# Altium PCB vehicle.PcbDoc
Units mm, origin at the board's own origin, x right, y up, seen from the top; angles counter-clockwise.
Board outline 40.6 x 27.3 mm, 2 copper layers (Top Layer, Bottom Layer); 26 components, 29 nets, 145 pads, 21 vias.
Unrouted connection lines stored in the file: 1.
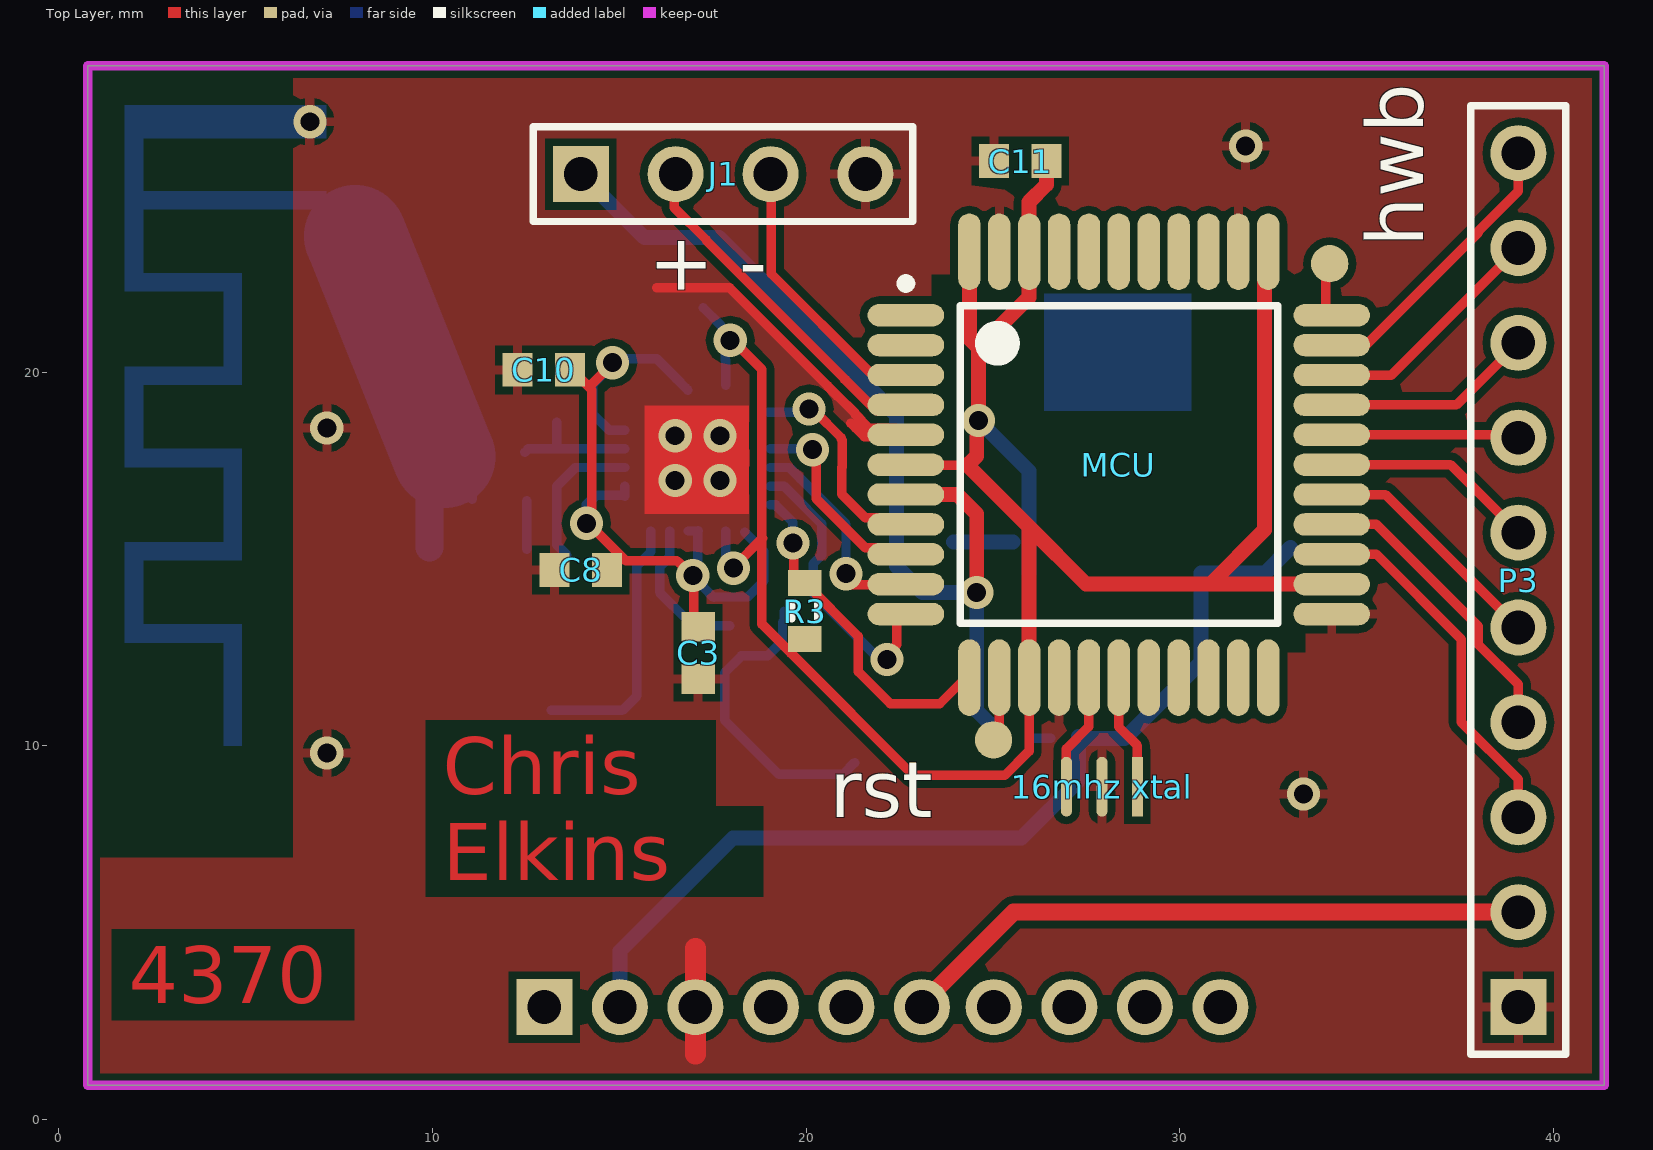
[diagram p0: Top Layer view]
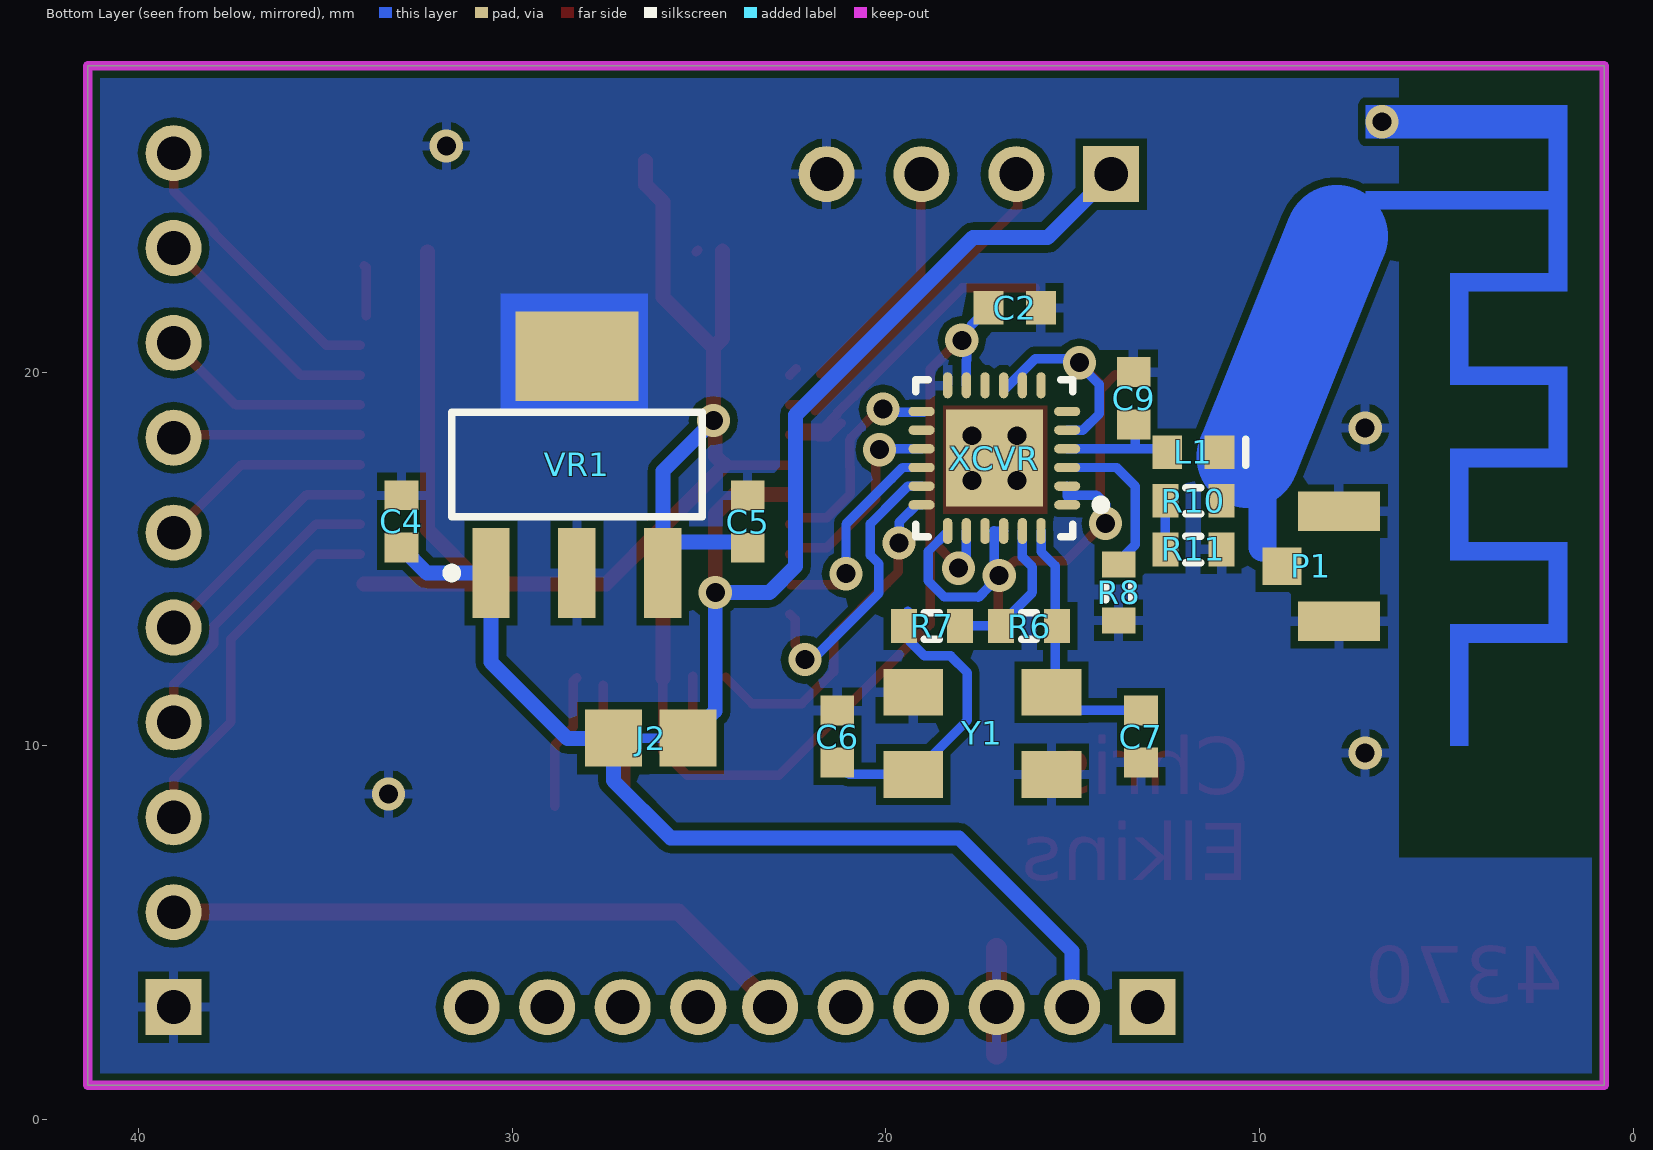
[diagram p1: Bottom Layer view, seen from below]

## Layer stack, top to bottom
Top Layer: signal copper 0.0356
Dielectric: dielectric 0.32, FR-4, Dk 4.8
Bottom Layer: signal copper 0.0356

## Board outline
0.77,0.9 0.77,28.2 41.37,28.2 41.37,0.9

## Design rules (kind name [scope] priority, off if disabled: settings)
Clearance [All] p1: gap=0.2
PolygonConnect [All] p1: connectstyle=Relief reliefconductorwidth=0.254 reliefentries=4 polygonreliefangle="90 Angle" airgapwidth=0.254
RoomDefinition vehicle [InComponentClass('vehicle')] p1: confinementstyle=ConfineOut formatcopy=TRUE lockcomponents=FALSE outline 145.97,-62.1 149.97,-62.1 149.97,-45.1 145.97,-45.1
RoutingVias [All] p1: holewidth=0.711 width=1.27 viastyle="Through Hole" minholewidth=0.711 minwidth=1.27 maxholewidth=0.711 maxwidth=1.27
SilkToSolderMaskClearance SilkscreenOverComponentPads [IsPad] p1: minsilkscreentomaskgap=0.254 clearancetoexposedcopper=TRUE
SolderMaskExpansion [All] p1: expansion=0.102
Width [All] p1: maxlimit=5 minlimit=0.254 preferedwidth=0.254
27 further rules are at their usual default settings.

## Components (designator, comment, footprint, x,y, rotation, side; value= is the part's Value field where it differs from the comment)
"16mhz xtal" "NCSTCE16M0V53-R0" OSC 28.87,8.9 r180 top
C2 "Cap Semi" CAPC1608L 16.55,21.72 r0 bottom
C3 "Cap Semi" CAPC1608L 17.11,12.48 r90 top
C4 "Cap Semi" CAPC1608L 32.97,16 r270 bottom
C5 "Cap Semi" CAPC1608L 23.702,15.996 r270 bottom
C6 "Cap Semi" CAPC1608L 21.302,10.242 r270 bottom
C7 "Cap Semi" CAPC1608L 13.174,10.242 r90 bottom
C8 "Cap Semi" CAPC1608L 13.97,14.7 r0 top
C9 "Cap Semi" CAPC1608L 13.37,19.3 r90 bottom
C10 "Cap Semi" CAPC1608L 12.98,20.06 r180 top
C11 "Cap Semi" CAPC1608L 25.734,25.648 r180 top
J1 "5000750517" HDR1X4 13.97,25.3 r0 top
J2 "jumper" "jumper pad" 25.3,10.2 r0 bottom
L1 "Inductor" INDC1608L 11.77,17.85 r0 bottom
MCU "ATMega32u4" TQFP44_M 28.374,17.52 r0 top
P1 "u.fl" "U.FL connector" 7.87,14.8 r270 bottom
P3 "Header 10" HDR1X10 39.07,3 r90 top
R3 "Res3" RESC1608L 19.97,13.6 r270 top
R6 "Res3" RESC1608L 16.17,13.2 r180 bottom
R7 "Res3" RESC1608L 18.77,13.2 r180 bottom
R8 "Res3" RESC1608L 13.77,14.1 r90 bottom
R10 "Res3" RESC1608L 11.77,16.55 r180 bottom
R11 "Res3" RESC1608L 11.77,15.25 r180 bottom
VR1 "MCP1703" SOT223-4N 28.274,17.52 r90 bottom
XCVR "CYRF8935" QFN50P400X400-24VAL 17.098,17.694 r0 bottom
Y1 "XTAL" PCBComponent_1 19.27,9.226 r180 bottom

## Footprints (in the part's own frame and the unit in brackets; to place one, negate y for a bottom-side part, rotate by r counter-clockwise, add the part's x,y. Pads: shape width x height; smd on the part's side, far side on the other; paste and mask are expansions set on the pad)
CAPC1608L [mm] "Chip Capacitor, Body 1.6x0.8mm, IPC High Density"
  rect 0.8x0.9 smd: 1(-0.7,0) 2(0.7,0)
  body extent -0.87,-0.48 0.87,0.48, height 1.3
HDR1X4 [mm] "Connector; Header; 4 Position"
  rect 1.5x1.5 hole 0.9: 1(0,0)
  round 1.5 hole 0.9: 2(2.54,0) 3(5.08,0) 4(7.62,0)
  silkscreen extent -1.27,-1.27 8.89,1.27
HDR1X10 [mm] "Connector; Header; 10 Position"
  rect 1.5x1.5 hole 0.9: 1(0,0)
  round 1.5 hole 0.9: 2(2.54,0) 3(5.08,0) 4(7.62,0) 5(10.16,0) 6(12.7,0) 7(15.24,0) 8(17.78,0) 9(20.32,0) 10(22.86,0)
  silkscreen extent -1.27,-1.27 24.13,1.27
INDC1608L [mm] "Chip Inductor, Body 1.6x0.8mm, IPC High Density"
  rect 0.8x0.9 smd: 1(-0.7,0) 2(0.7,0)
  silkscreen extent -1.4,-0.35 -1.4,0.35, body extent -0.87,-0.48 0.87,0.48, height 0.55
"jumper pad" [mil]
  rect 60x60 smd: 1(0,0) 2(78.74,0)
  Top Layer lines w10: 29.53,0 49.21,0
OSC [mm]
  rect 0.3x1.6 smd: 1(0,0)
  oval 0.3x1.6 smd: 2(0.95,0) 3(1.9,0)
PCBComponent_1 [mm]
  rect 1.6x1.25 smd: 1(0,0) 2(3.7,2.2) 3(0,2.2) 3(3.7,0)
QFN50P400X400-24VAL [mm] "24-Pin Plastic Quad Flat No-Lead 0.5 mm Pitch"
  oval 0.7x0.25 smd mask+0.09: 1(-1.95,1.25) 2(-1.95,0.75) 3(-1.95,0.25) 4(-1.95,-0.25) 5(-1.95,-0.75) 6(-1.95,-1.25) 13(1.95,-1.25) 14(1.95,-0.75) 15(1.95,-0.25) 16(1.95,0.25) 17(1.95,0.75) 18(1.95,1.25)
  oval 0.25x0.7 smd mask+0.09: 7(-1.25,-1.95) 8(-0.75,-1.95) 9(-0.25,-1.95) 10(0.25,-1.95) 11(0.75,-1.95) 12(1.25,-1.95) 19(1.25,1.95) 20(0.75,1.95) 21(0.25,1.95) 22(-0.25,1.95) 23(-0.75,1.95) 24(-1.25,1.95)
  rect 2.6x2.6 smd: 25(0,0)
  silkscreen extent -2.97,-2.1 2.1,2.1, body extent -2.07,-2.07 2.07,2.07, height 1
RESC1608L [mm] "Chip Resistor, Body 1.6x0.8mm, IPC High Density"
  rect 0.7x0.9 smd: 1(-0.75,0) 2(0.75,0)
  silkscreen extent -0.2,-0.35 0.2,0.35, body extent -0.85,-0.48 0.85,0.48, height 0.9
SOT223-4N [mm] "SOT223, 4-Leads, Body 6.5x3.5mm, Pitch 2.3mm, Lead Span 7mm, IPC Medium Density"
  rect 2.4x1 smd: 1(-2.9,2.3) 2(-2.9,0) 3(-2.9,-2.3)
  rect 2.4x3.3 smd: 4(2.9,0)
  silkscreen extent -3.02,-3.35 1.4,3.48, body extent -1.85,-3.35 1.85,3.35, height 1.7
TQFP44_M [mm] "Thin QFP, 44-Leads, Body 10x10mm, Pitch 0.8mm, IPC Low Density"
  oval 2.05x0.6 smd mask+0.07: 1(-5.7,4) 2(-5.7,3.2) 3(-5.7,2.4) 4(-5.7,1.6) 5(-5.7,0.8) 6(-5.7,0) 7(-5.7,-0.8) 8(-5.7,-1.6) 9(-5.7,-2.4) 10(-5.7,-3.2) 11(-5.7,-4) 23(5.7,-4) 24(5.7,-3.2) 25(5.7,-2.4) 26(5.7,-1.6) 27(5.7,-0.8) 28(5.7,0) 29(5.7,0.8) 30(5.7,1.6) 31(5.7,2.4) 32(5.7,3.2) 33(5.7,4)
  oval 0.6x2.05 smd mask+0.07: 12(-4,-5.7) 13(-3.2,-5.7) 14(-2.4,-5.7) 15(-1.6,-5.7) 16(-0.8,-5.7) 17(0,-5.7) 18(0.8,-5.7) 19(1.6,-5.7) 20(2.4,-5.7) 21(3.2,-5.7) 22(4,-5.7) 34(4,5.7) 35(3.2,5.7) 36(2.4,5.7) 37(1.6,5.7) 38(0.8,5.7) 39(0,5.7) 40(-0.8,5.7) 41(-1.6,5.7) 42(-2.4,5.7) 43(-3.2,5.7) 44(-4,5.7)
  silkscreen extent -5.82,-4.25 4.25,4.97, body extent -5,-5 5,5, height 1.6
"U.FL connector" [mm] "u.fl smd connector"
  rect 1x1.05 smd: 1(0,-1.525)
  rect 1.05x2.2 smd: 2(-1.475,0) 2(1.475,0)

## Part data
C2 C3 C4 C5 C6 C7 C8 C9 C10 C11: "Capacitor (Semiconductor SIM Model)"
J1: "USB On-The-Go (OTG) Mini-B Receptacle, Right Angle, Thru-Hole, 0.80mm (.031\") Pitch, Solder Tails & Shell Tabs with Dimples"
J2: library part "solder jumper"
MCU: "usb enabled avr microcontroller"
P1: library part BNC, "BNC Elbow Connector"
P3: "Header, 10-Pin"
R3 R6 R7 R8 R10 R11: "Resistor"
VR1: library part "Volt Reg", "Voltage Regulator"
Y1: "Crystal Oscillator"

## Free pads (board coordinates)
  rect 1.5x1.5 hole 0.9: 1(12.992,3)
  round 1 smd: 1(25.02,10.15) 1(34.02,22.9)
  round 1.5 hole 0.9: 2(15.014,3) 3(17.037,3) 4(19.059,3) 5(21.081,3) 6(23.103,3) 7(25.026,3) 8(27.048,3) 9(29.07,3) 10(31.092,3)

## Via types
v1: diameter 0.889, hole 0.508, Top Layer to Bottom Layer, tented both sides, 21 vias

## Nets (pads, with @x,y where several pads share a name; then routed paths per layer and width w, separated by ;. In a path a pad name is that pad's centre, name@x,y a point inside that pad or via, vN(x,y) a via of type N, cw(c..) or ccw(c..) an arc to the next point about the centre after c; other vN are vias at no path point)
GND: "16mhz xtal.2" C2.1 C3.1 C4.1 C5.1 C6.1 C7.1 C8.1 C9.2 C10.2 C11.2 J1.4 MCU.5 MCU.15 MCU.23 MCU.35 MCU.43 P1.2 P3.1 pad.3 R8.1 R11.2 VR1.2 VR1.4 XCVR.12 XCVR.25 Y1.3 | length 12.8
  Top Layer w0.254: 16.01,22.25 17.958,22.25 20.575,19.633 20.575,19.623 20.841,19.357 20.851,19.357 21.322,18.886 21.322,18.86 21.689,18.493 ; 21.2,18.63 21.56,18.27 MCU.5@21.83,18.27 ; MCU.5@22.51,18.3 21.882,18.3 21.689,18.493 ; MCU.5@22.574,18.32 22.401,18.493 21.689,18.493 ; MCU.43@25.034,23.26 MCU.43@25.074,23.22
  Top Layer w0.554: 17.04,1.74 17.04,3 17.04,4.57
  other v1: 33.32,8.7 7.17,9.8 16.498,17.094 17.698,17.094 16.498,18.294 17.698,18.294 7.17,18.5 31.77,26.05 6.72,26.7
"Net16mhz xtal_1": "16mhz xtal.1" MCU.17 | length 3.7
  Top Layer w0.254: MCU.17@28.274,11.82 28.324,11.77 28.37,11.724 28.37,10.5 28.87,10 28.87,8.9 28.87,8.376
"Net16mhz xtal_3": "16mhz xtal.3" MCU.16 | length 3
  Top Layer w0.254: 26.97,8.9 26.97,9.91 27.57,10.51 MCU.16@27.57,11.62
NetC6_2: C6.2 R7.1 Y1.1 | length 8.2
  Bottom Layer w0.254: R7.1@19.418,13.598 19.418,13.348 19.395,13.325 19.37,13.3 19.37,13.2 19.37,12.8 18.97,12.4 18.27,12.4 17.82,11.95 17.82,10.676 Y1.1 20.986,9.226 C6.2
NetC7_2: C7.2 R6.2 XCVR.24 Y1.2 | length 7
  Bottom Layer w0.254: C7.2 15.086,10.942 15.472,11.328 15.472,11.426 15.472,13.2 15.472,14.812 15.848,15.188 XCVR.24
NetC9_1: C9.1 L1.2 XCVR.4 | length 3.3
  Bottom Layer w0.254: L1.2 12.57,17.95 XCVR.4@15.142,17.95 ; 13.32,18.048 13.32,18.6 C9.1@13.32,18.65
NetE1_1: L1.1 P1.1 R10.2 | length 9.8
  Bottom Layer w0.254: R10.2@11.07,16.6 L1.1
  Bottom Layer w0.754: 9.92,15.3 9.92,17.5
  Bottom Layer w2.743: 7.938,23.639 10.31,17.73
NetJ1_2: J1.2 MCU.4 | length 9.7
  Top Layer w0.254: J1.2@16.47,25.6 16.47,25.3 16.47,24.4 17.327,23.543 17.327,23.523 21.029,19.821 21.029,19.811 ; 21.06,19.79 MCU.4@21.862,18.988 ; MCU.4@21.862,18.978 MCU.4@21.862,18.988 ; MCU.4@21.862,19.12 MCU.4@21.862,18.988 ; MCU.4@21.893,18.957 MCU.4@21.862,18.988 ; MCU.4@21.913,19.12 MCU.4@22.574,19.12
NetJ1_3: J1.3 MCU.3 | length 6.7
  Top Layer w0.254: J1.3@19.07,25.3 19.07,22.63 MCU.3@21.74,19.96 ; MCU.3@22.401,20.093 MCU.3@22.574,19.92
NetMCU_8: MCU.8 XCVR.13 | length 5.7
  Top Layer w0.254: v1@20.226,18.956 20.941,18.24 20.941,18.199 20.966,18.174 20.966,17.454 20.96,17.448 20.96,16.722 21.589,16.093 22.401,16.093 MCU.8@22.574,15.92
  Bottom Layer w0.254: XCVR.13@18.99,18.92 19.048,18.92 20.08,18.92 v1@20.2,18.92
  other v1: 20.08,19.009
NetMCU_9: MCU.9 XCVR.15 | length 5.3
  Top Layer w0.254: v1@20.27,17.85 20.27,16.612 21.589,15.293 22.401,15.293 MCU.9@22.574,15.12
  Bottom Layer w0.254: XCVR.15 20.17,17.944 v1@20.176,17.944
  other v1: 20.17,17.92
NetMCU_10: MCU.10 XCVR.16 | length 5.4
  Top Layer w0.254: v1@21.17,14.3 MCU.10@22.554,14.3
  Bottom Layer w0.254: XCVR.16 19.554,17.444 19.85,17.149 21.07,15.929 v1(21.07,14.6)
NetMCU_11: MCU.11 XCVR.17 | length 7.7
  Top Layer w0.254: v1@22.1,12.37 22.43,12.7 22.43,13.376 MCU.11@22.574,13.52
  Bottom Layer w0.254: XCVR.17 19.412,16.944 19.662,16.695 20.421,15.935 20.421,15.1 20.19,14.869 20.19,14.08 21.9,12.37 v1@22.07,12.37
  other v1: 22.17,12.3
NetMCU_12: MCU.12 R3.1 XCVR.18 | length 9
  Top Layer w0.254: v1@19.67,15.41 19.67,14.65 R3.1 21.399,12.922 21.399,11.98 22.259,11.12 23.58,11.12 MCU.12@24.29,11.83
  Bottom Layer w0.254: XCVR.18 19.184,16.444 19.65,15.978 v1(19.65,15.42)
NetMCU_25: MCU.25 P3.3 | length 9.8
  Top Layer w0.254: MCU.25 35.27,15.12 37.539,12.851 37.539,10.628 39.07,9.097 P3.3
NetMCU_26: MCU.26 P3.4 | length 8.1
  Top Layer w0.254: MCU.26 35.27,15.92 37.993,13.197 37.993,12.714 39.07,11.637 P3.4
NetMCU_27: MCU.27 P3.5 | length 6.5
  Top Layer w0.254: MCU.27 35.51,16.72 P3.5
NetMCU_28: MCU.28 P3.6 | length 5.7
  Top Layer w0.254: MCU.28 37.25,17.52 P3.6
NetMCU_29: MCU.29 P3.7 | length 5
  Top Layer w0.254: MCU.29 38.99,18.32 P3.7
NetMCU_30: MCU.30 P3.8 | length 5.7
  Top Layer w0.254: MCU.30 37.41,19.12 P3.8
NetMCU_31: MCU.31 P3.9 | length 6.4
  Top Layer w0.254: MCU.31 35.67,19.92 P3.9
NetMCU_32: MCU.32 P3.10 | length 7.7
  Top Layer w0.254: MCU.32 34.99,20.72 37.993,23.723 37.993,23.766 39.07,24.843 P3.10
NetR6_1: R6.1 R7.2 XCVR.23 | length 3.9
  Bottom Layer w0.254: XCVR.23 16.348,15.046 16.08,14.778 16.08,14.1 R6.1@16.84,13.34 ; R6.1@16.922,13.208 R7.2@17.962,13.208
NetR8_2: R8.2 XCVR.3 | length 4
  Bottom Layer w0.254: R8.2@13.6,15.1 13.32,15.38 13.32,16.94 13.824,17.444 XCVR.3
NetR10_1: R10.1 R11.1 | length 1.3
  Bottom Layer w0.254: R11.1 R10.1
VBAT: C4.2 J2.2 P3.2 pad.2 pad.6 VR1.1 | length 44.1
  Top Layer w0.454: pad.6@23.07,3.05 pad.6@23.245,3.225 ; pad.6@23.47,3 23.287,3.183 pad.6@23.245,3.225 ; P3.2 25.56,5.54 pad.6@23.47,3.45 ; pad.6@23.245,3.225 pad.6@23.47,3.45 ; pad.6@23.245,3.225 23.02,3.45 23.103,3.45 pad.6@23.47,3.45
  Bottom Layer w0.4: pad.2 15.014,4.494 18.05,7.53 25.77,7.53 27.3,9.06 J2.2 J2.2@27.3,10.24 ; J2.2@27.398,10.108 27.48,10.19 28.53,10.19 30.574,12.234 VR1.1 32.29,14.62 C4.2
VCC: C2.2 C5.2 C11.1 MCU.6 MCU.14 MCU.24 MCU.34 MCU.42 MCU.44 R3.2 VR1.3 XCVR.11 XCVR.20 | length 67
  Top Layer w0.254: v1@17.94,20.95 18.005,20.885 18.82,20.07 18.82,15.54 ; v1@18.09,14.81 18.82,15.54 ; 18.835,15.555 18.82,15.54 ; MCU.6@22.574,17.52 22.594,17.5 22.674,17.5 24.32,17.5 ; MCU.14@25.97,11.85 25.97,11.82 25.97,9.85 25.32,9.2 22.87,9.2 19.595,12.475 18.82,13.25 18.82,15.54
  Top Layer w0.4: 24.31,17.52 24.325,17.505 ; 24.32,17.5 24.325,17.505 ; MCU.44@24.374,23.24 MCU.44 24.374,20.896 24.62,20.65 ; v1@24.38,18.706 24.497,18.823 24.62,18.946 24.62,20.65 ; v1(24.62,18.7) 24.57,18.224 24.57,17.75 24.325,17.505 ; MCU.14@25.97,11.8 25.97,11.82 25.97,15.85 27.5,14.32 30.82,14.32 ; 25.97,15.86 24.325,17.505 ; C11.1 26.434,25.014 25.97,24.55 25.97,23.22 25.97,22 24.62,20.65 ; MCU.34@32.274,23.22 32.274,15.774 30.82,14.32 ; MCU.24@33.974,14.32 30.82,14.32
  Bottom Layer w0.254: C2.2 17.72,21.25 ; 17.84,20.32 v1@17.84,20.78 ; v1@17.848,14.972 XCVR.20 ; XCVR.11 17.848,20.312
  Bottom Layer w0.4: C5.2@23.948,15.45 VR1.3@25.544,15.45 ; v1@24.72,18.6 25.974,17.346 VR1.3
  other v1: 18.059,14.749 17.97,20.85
VDD: C3.2 C8.2 C10.1 XCVR.1 XCVR.2 XCVR.5 XCVR.8 XCVR.9 XCVR.19 XCVR.21 XCVR.22 | length 22
  Top Layer w0.254: C10.1@13.86,19.93 14.26,19.53 14.26,15.95 14.26,15.86 15.045,15.075 15.17,14.95 16.54,14.95 16.988,14.572 16.99,14.57 16.99,14.55 C3.2@16.99,13.41 ; 14.23,19.64 14.82,20.23 v1(14.82,20.25)
  Bottom Layer w0.254: 15.12,16.7 15.148,16.672 XCVR.2 ; XCVR.5 14.726,18.444 14.29,18.88 14.29,19.67 14.845,20.225 14.97,20.35 16.006,20.35 16.53,19.826 16.78,19.576 XCVR.9@16.838,19.518 ; XCVR.22 17.1,15.744 ; v1@17.1,14.547 17.1,14.55 17.1,15.744 ; 17.1,15.75 17.1,15.744 ; v1@17.12,14.75 17.143,14.572 17.145,14.553 v1@17.18,14.28 ; 17.12,15.75 17.114,15.744 17.1,15.744 ; v1@17.24,14.34 17.24,14.25 17.524,13.966 17.535,13.977 18.438,13.977 18.87,14.409 18.87,15.201 XCVR.19@18.355,15.715
  Bottom Layer w0.264: v1(14.12,15.95) 14.12,16.02 14.26,16.16 14.12,16.3 14.12,16.45 14.37,16.7 15.12,16.7
  other v1: 16.97,14.55
VUSB: J1.1 J2.1 MCU.7 | length 25.6
  Top Layer w0.254: MCU.7@22.574,16.72 MCU.7
  Top Layer w0.4: MCU.7 24.05,16.72 24.57,16.2 v1@24.57,14.3
  Bottom Layer w0.4: J1.1 15.67,23.6 17.67,23.6 22.42,18.85 22.42,14.8 23.12,14.1 v1@24.37,14.1 ; v1(24.57,14.1) 24.57,13.03 24.57,10.93 J2.1@25.18,10.32
pads on no net: MCU.1 MCU.2 MCU.13 MCU.18 MCU.19 MCU.20 MCU.21 MCU.22 MCU.33 MCU.36 MCU.37 MCU.38 MCU.39 MCU.40 MCU.41 XCVR.6 XCVR.7 XCVR.10 XCVR.14
copper on no net: | length 3
  Top Layer w0.254: 25.17,10.2 25.17,11.85 ; 33.92,21.5 33.92,22.8 33.97,22.85

## Polygon pours and split planes (outlines as drawn)
GND on Top Layer "Top Layer-No Net" (solid, remove dead copper, pour order 1001): 47.17,-7.7 45.303,-5.327 45.303,29.37 1.065,29.37 -0.62,27.228 0.447,25.873 0.447,-6.421
GND on Bottom Layer "Top Layer-No Net" (solid, remove dead copper, pour order 1000): 46.57,29.39 46.57,0.098 45.196,-1.324 45.122,-1.4 -1.59,-1.4 -1.59,28.603 -0.903,29.314

## Keep-outs
Keep-Out Layer:
  the board outline again, w0.254

## Other copper
Top Layer:
  rectangle net GND: 15.67,16.2 18.47,19.1
  pour cut-out: 33.37,12.5 23.37,12.5 23.37,22.6 33.37,22.6
  text "Chris" at 10.27,8.7 h1.52
  text "Elkins" at 10.27,6.4 h1.52
  text "4370" at 1.87,3.1 h1.52
Bottom Layer:
  region net NetE1_1: 1.76,15.45 1.76,12.75 2.26,12.75 2.26,15.45
  region net NetE1_1: 1.76,20.15 1.76,17.45 2.26,17.45 2.26,20.15
  region net NetE1_1: 2.04,17.95 2.04,17.45 4.9,17.45 4.9,17.95
  region net NetE1_1: 1.93,20.15 1.93,19.65 4.9,19.65 4.9,20.15
  region net NetE1_1: 2.11,15.45 2.11,14.95 4.9,14.95 4.9,15.45
  region net NetE1_1: 4.4,17.65 4.4,15.25 4.9,15.25 4.9,17.65
  region net NetE1_1: 4.4,22.42 4.4,19.92 4.9,19.92 4.9,22.42
  region net NetE1_1: 2.07,22.65 2.07,22.15 4.9,22.15 4.9,22.65
  region net NetE1_1: 1.76,27.15 1.76,22.15 2.26,22.15 2.26,27.15
  region net NetE1_1: 2.19,27.15 2.19,26.25 7.16,26.25 7.16,27.15
  region net NetE1_1: 2.05,24.85 2.05,24.35 7.16,24.35 7.16,24.85
  region net NetE1_1: 2.03,13.25 2.03,12.75 4.9,12.75 4.9,13.25
  region net NetE1_1: 4.4,12.97 4.4,9.99 4.9,9.99 4.9,12.97
  rectangle net GND: 26.37,18.95 30.32,22.1
  pour cut-out: 6.77,13.3 6.77,16.3 8.97,16.3 8.97,13.3
Multi-Layer:
  pour cut-out: 6.27,28.05 6.27,7 0.77,7 0.77,28.05

## Silkscreen, mask and mechanical layers (free items; w line width, h text height)
Top Overlay:
  text "hwb" at 36.52,23.35 h1.52 r90
  text "+ -" at 15.79,22.2 h1.52
  text "rst" at 20.63,8.08 h1.52
Top Solder:
  circle w0.254: c25.02,8.15 r0.5
  circle w0.254: c25.02,8.15 r0.255
  circle w0.254: c25.02,8.15 r0.05
  circle w0.254: c34.02,24.5 r0.5
  circle w0.254: c34.02,24.5 r0.25
  circle w0.254: c34.02,24.5 r0.05
  rectangle: 15.77,16.4 18.47,19.1
Bottom Solder:
  rectangle: 26.02,18.95 30.87,24